# Altium PCB PCB1.PcbDoc
Units mil, origin at the board's own origin, x right, y up, seen from the top; angles counter-clockwise.
Board outline 6000 x 4000 mil, 2 copper layers (Top Layer, Bottom Layer); 3 components, 2 nets, 63 pads, 27 vias.
Unrouted connection lines stored in the file: 8.
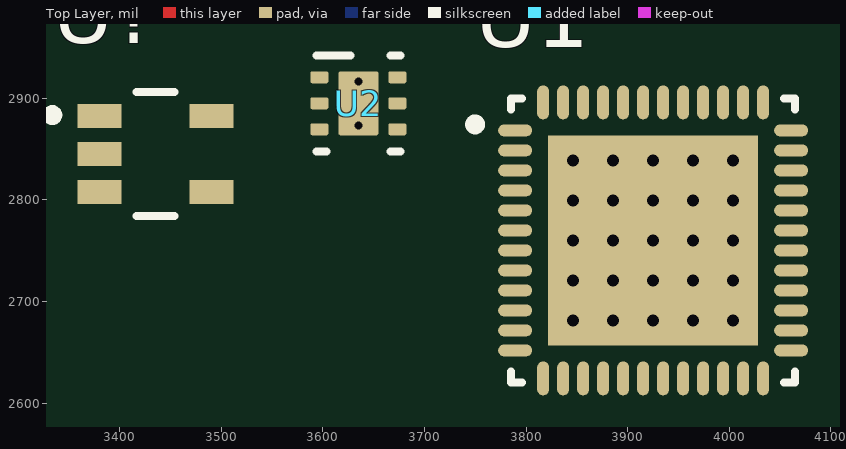
[diagram p0: Top Layer view]
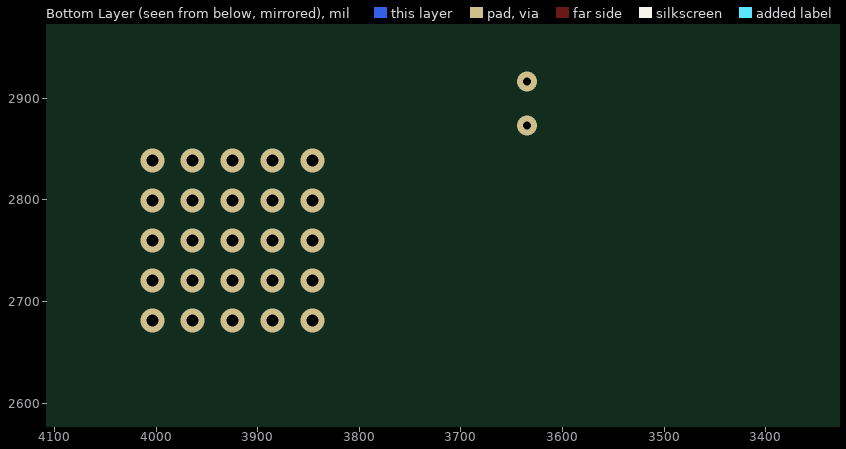
[diagram p1: Bottom Layer view, seen from below]

## Layer stack, top to bottom
Top Solder: solder mask 0.4, Solder Resist, Dk 3.5
Top Layer: signal copper 1.4
Dielectric 1: dielectric 12.6, FR-4, Dk 4.8
Bottom Layer: signal copper 1.4
Bottom Solder: solder mask 0.4, Solder Resist, Dk 3.5

## Board outline
1000,1000 7000,1000 7000,5000 1000,5000

## Design rules (kind name [scope] priority, off if disabled: settings)
Clearance [All] p1: gap=10 ignorepadtopadclearanceinfootprint=FALSE except(0: Arc-Hole Track-Hole SMDPad-Hole THPad-Hole Via-Hole Fill-Hole Poly-Hole Region-Hole Text-Hole)
PolygonConnect [All] p1: connectstyle=Relief reliefconductorwidth=10 reliefentries=4 polygonreliefangle="90 Angle" airgapwidth=10
RoutingVias [All] p1: holewidth=28 width=50 viastyle="Through Hole" minholewidth=28 minwidth=50 maxholewidth=28 maxwidth=50
SolderMaskExpansion [All] p1: expansion=4 istentingtop=FALSE
Width [All] p1: maxlimit=10 minlimit=10 preferedwidth=10
30 further rules are at their usual default settings.

## Components (designator, comment, footprint, x,y, rotation, side; value= is the part's Value field where it differs from the comment)
U1 "ATSAMD21G18A-MU" FP-C04-21493-MFG 3925,2760 r0 top
U2 "TPS73533DRVT" DRV0006A_V 3635,2895 r0 top
U? "MCP73832T-2ACI/OT" FP-C04-091-OT-MFG 3435,2845 r0 top

## Footprints (in the part's own frame and the unit in brackets; to place one, negate y for a bottom-side part, rotate by r counter-clockwise, add the part's x,y. Pads: shape width x height; smd on the part's side, far side on the other; paste and mask are expansions set on the pad)
DRV0006A_V [mm] "SON, 6-Leads, Body 2x2mm, Pitch 0.65mm, Thermal Pad 1.6x1mm, TI Recommended"
  rrect33% 0.45x0.3 smd: 1(-0.975,0.65) 2(-0.975,0) 3(-0.975,-0.65) 4(0.975,-0.65) 5(0.975,0) 6(0.975,0.65)
  rrect14% 1x0.7 on Top Paste: 7(0,-0.45) 7(0,0.45)
  rrect10% 1x1.6 smd paste-0.5: 7(0,0)
  silkscreen extent -1.05,-1.2 1.05,1.2, body extent -1.05,-1.05 1.05,1.05, height 0.81
FP-C04-091-OT-MFG [mm]
  rect 1.1x0.6 smd paste+0 mask+0: 1(-1.4,0.95) 2(-1.4,0) 3(-1.4,-0.95) 4(1.4,-0.95) 5(1.4,0.95)
  silkscreen extent -2.7,-1.55 0.48,1.55, body extent -2.05,-1.9 2.05,1.9, height 0.25
FP-C04-21493-MFG [mm]
  rrect100% 0.85x0.3 smd paste+0 mask+0: 1(-3.45,2.75) 2(-3.45,2.25) 3(-3.45,1.75) 4(-3.45,1.25) 5(-3.45,0.75) 6(-3.45,0.25) 7(-3.45,-0.25) 8(-3.45,-0.75) 9(-3.45,-1.25) 10(-3.45,-1.75) 11(-3.45,-2.25) 12(-3.45,-2.75) 25(3.45,-2.75) 26(3.45,-2.25) 27(3.45,-1.75) 28(3.45,-1.25) 29(3.45,-0.75) 30(3.45,-0.25) 31(3.45,0.25) 32(3.45,0.75) 33(3.45,1.25) 34(3.45,1.75) 35(3.45,2.25) 36(3.45,2.75)
  rrect100% 0.3x0.85 smd paste+0 mask+0: 13(-2.75,-3.45) 14(-2.25,-3.45) 15(-1.75,-3.45) 16(-1.25,-3.45) 17(-0.75,-3.45) 18(-0.25,-3.45) 19(0.25,-3.45) 20(0.75,-3.45) 21(1.25,-3.45) 22(1.75,-3.45) 23(2.25,-3.45) 24(2.75,-3.45) 37(2.75,3.45) 38(2.25,3.45) 39(1.75,3.45) 40(1.25,3.45) 41(0.75,3.45) 42(0.25,3.45) 43(-0.25,3.45) 44(-0.75,3.45) 45(-1.25,3.45) 46(-1.75,3.45) 47(-2.25,3.45) 48(-2.75,3.45)
  rect 5.25x5.25 smd paste+0 mask+0: 49(0,0)
  silkscreen extent -4.57,-3.55 3.55,3.55, body extent -3.98,-3.98 3.98,3.98, height 0.25

## Part data
U1: library part CMP-06276-000052-1, "IC MCU 32BIT 256KB FLASH 48QFN", Case/Package=QFN, Frequency=48MHz, Max Operating Temperature=85°C, Min Operating Temperature=-40°C, Core Architecture=ARM, Interface=I2C, Memory Size=256KB, Memory Type=FLASH, Number of I/Os=38, Oscillator Type=Internal, Packaging=Tray, Peripherals="Brown-out Detect/Reset"
U2: library part CMP-0395-00672-2, "Single Output High PSRR LDO, 500 mA, Fixed 3.3 V Output, 2.7 to 6.5 V Input, with Low IQ, 6-pin SON (DRV), -40 to 125 degC, Green (RoHS & no Sb/Br)", Manufacturer="Texas Instruments", Accuracy(%)=2, ComponentLink1Description="Manufacturer URL", ComponentLink1URL=http://www.ti.com/, ComponentLink2Description=Datasheet, ComponentLink2URL=http://www.ti.com/general/docs/lit/getliterature.tsp?genericPartNumber=TPS73533&fileType=pdf, ComponentLink3Description="Package Specification", ComponentLink3URL=http://www.ti.com/litv/pdf/mpds216d, DatasheetVersion=SBVS087J, Eco-Plan="Green (RoHS & no Sb/Br)", Fixed Output Options(V)=3.3, Iout(Max)(A)=0.5, Iq(Typ)(mA)=0.04, Mounting Technology="Surface Mount", PackageDescription="6-Pin Plastic Small Outline No-Lead, Body 2 x 2 mm, Pitch 0.65 mm", PackageReference=DRV0006A, PackageVersion=4206925/E, PartNumber=TPS73533DRVT, SubFamily="Single Channel LDO", Vdo(Typ)(mV)=280, Vin(Max)(V)=6.5, Vin(Min)(V)=2.7, Vout Adj(Max)(V)=3.3, Vout Adj(Min)(V)=3.3
U?: library part CMP-0133-00138-2, "IC LI-ION/LI-POLY CTRLR SOT23-5", Case/Package=SOT-23, Max Charge Current=500mA, Max Input Voltage=6V, Max Operating Temperature=85°C, Max Output Voltage=4.5V, Max Power Dissipation=1.54W, Min Operating Temperature=-40°C, Min Output Voltage=4.168V, Min Supply Voltage=3.75V, Output Current=10mA, Output Voltage=4.2V, Package Quantity=3000, Contact Plating=Tin, Height=1.3mm, Lead Free="Lead Free", Length=3.1mm, Max Output Current=500mA, Max Supply Voltage=6V, Mount="Surface Mount", Number of Cells=1, Number of Channels=1, Number of Outputs=1, Number of Pins=5, Packaging="Tape and Reel", Power Dissipation=1.54W, Radiation Hardening=No, REACH SVHC="No SVHC", Termination=SMD/SMT, Width=1.8mm

## Via types
v1: diameter 23.62, hole 11.81, Top Layer to Bottom Layer, 25 vias
v2: diameter 19.68, hole 7.87, Top Layer to Bottom Layer, 2 vias

## Nets (pads, with @x,y where several pads share a name; then routed paths per layer and width w, separated by ;. In a path a pad name is that pad's centre, name@x,y a point inside that pad or via, vN(x,y) a via of type N, cw(c..) or ccw(c..) an arc to the next point about the centre after c; other vN are vias at no path point)
3v3: U1.6 U1.17 U1.36 U1.43 U1.44
GND: U1.5 U1.18 U1.35 U1.42 U1.49
  other v1: 3846.26,2681.26 3885.63,2681.26 3925,2681.26 3964.37,2681.26 4003.74,2681.26 3846.26,2720.63 3885.63,2720.63 3925,2720.63 3964.37,2720.63 4003.74,2720.63 3846.26,2760 3885.63,2760 3925,2760 3964.37,2760 4003.74,2760 3846.26,2799.37 3885.63,2799.37 3925,2799.37 3964.37,2799.37 4003.74,2799.37 3846.26,2838.74 3885.63,2838.74 3925,2838.74 3964.37,2838.74 4003.74,2838.74
pads on no net: U1.1 U1.2 U1.3 U1.4 U1.7 U1.8 U1.9 U1.10 U1.11 U1.12 U1.13 U1.14 U1.15 U1.16 U1.19 U1.20 U1.21 U1.22 U1.23 U1.24 U1.25 U1.26 U1.27 U1.28 U1.29 U1.30 U1.31 U1.32 U1.33 U1.34 U1.37 U1.38 U1.39 U1.40 U1.41 U1.45 U1.46 U1.47 U1.48 U2.1 U2.2 U2.3 U2.4 U2.5 U2.6 U2.7 U?.1 U?.2 U?.3 U?.4 U?.5
copper on no net:
  other v2: 3635,2873.35 3635,2916.65